# EAGLE board SPH0645 (EAGLE 9.6.2)
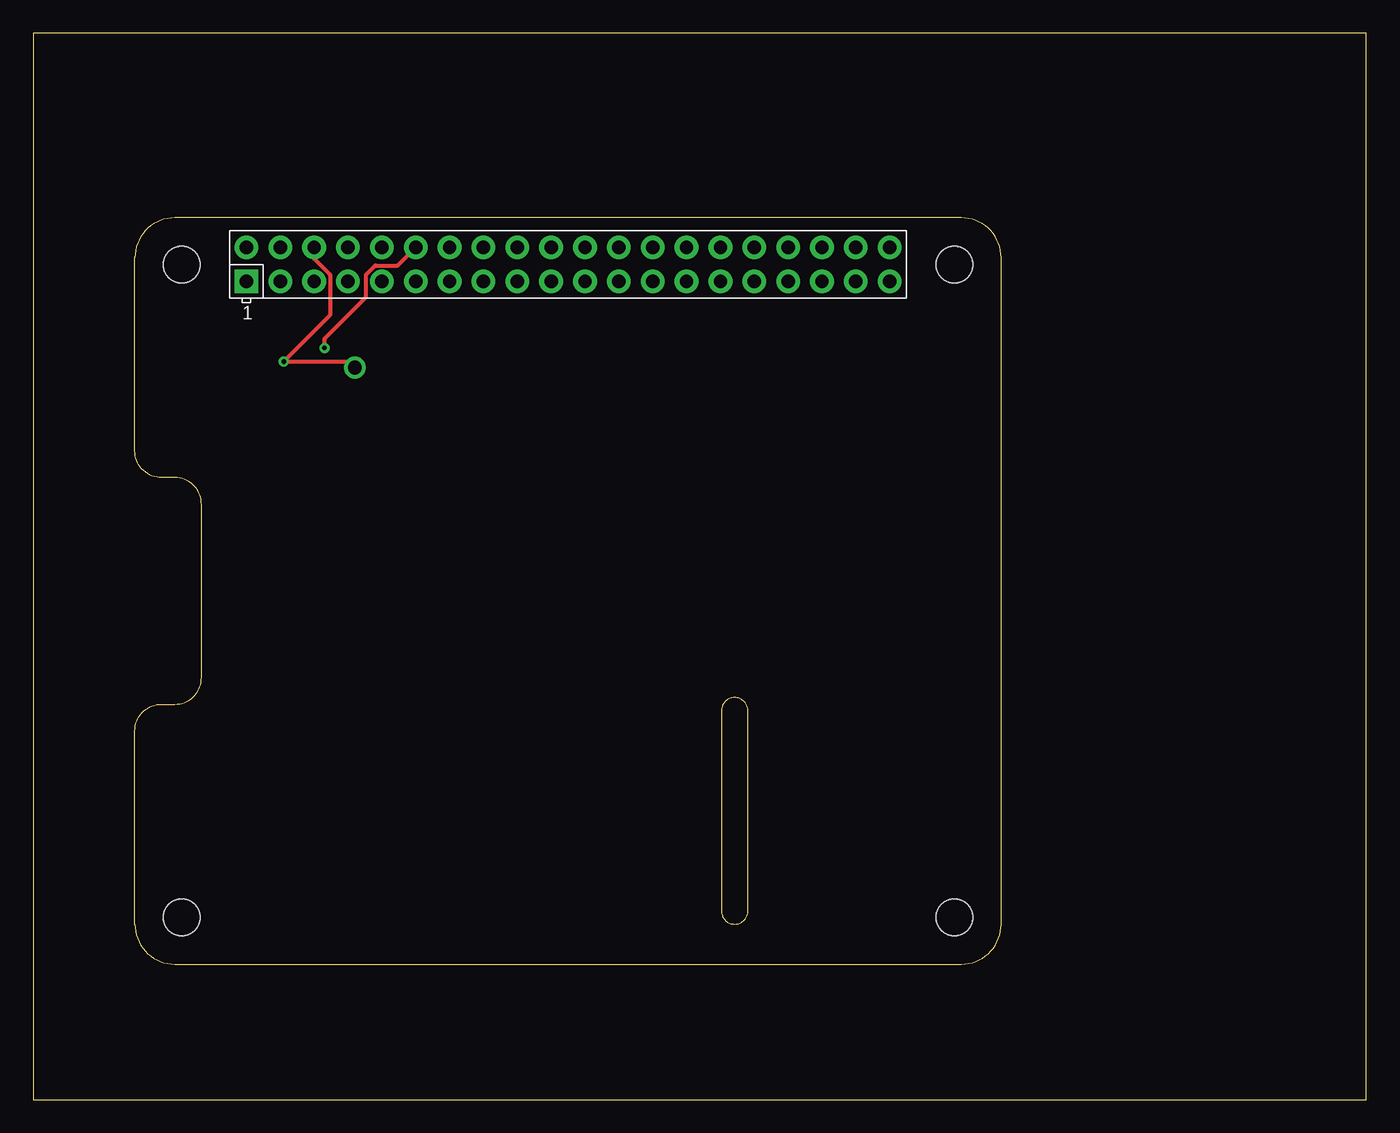
[diagram p0: board, top side]
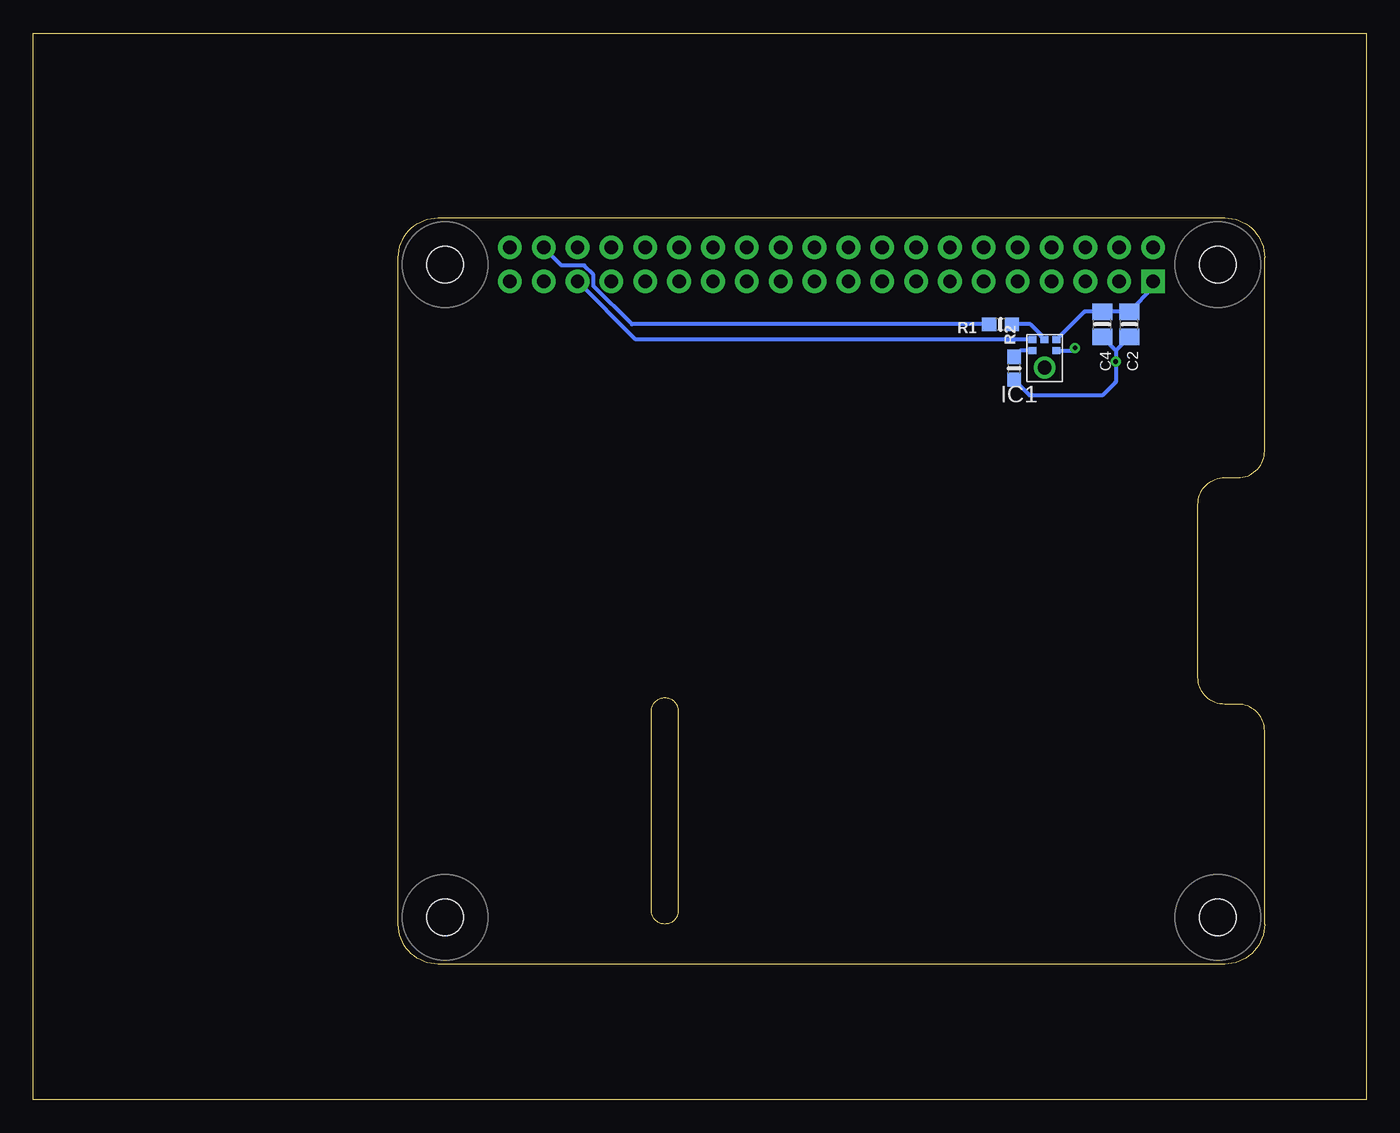
[diagram p1: board, bottom side, seen from below]

Size 100 x 80 mm. Coordinates in mm from the lower left corner, seen from the top.
Outline: 0,0 100,0 100,80 0,80 0,0
Copper layers (1*16): Top 0.035mm / dielectric 1.5mm / Bottom 0.035mm
Design rules "default": minimum track width 6mil, minimum drill 0.35mm, track to track 6mil, track to pad 6mil, pad to pad 6mil, via to via 6mil, smd to smd 6mil, copper to edge 40mil, drill to drill 6mil, minimum pad ring 10mil, minimum via ring 8mil, stop-mask expansion 4mil, vias tented up to drill 0mil, thermal gap 10mil

## Footprints (pad centres in the part's own frame; a part is rotated, then mirrored left to right if it is on the bottom)
0805-NO = smd 1.24 x 1.5: 1 -0.95,0; 2 0.95,0
SPH0645LM4H = smd 0.6 x 0.525: 1 -0.9,1.4; 2 -0.9,0.55; 4 0.9,0.55; 5 0.9,1.4; 6 0,1.4 | drill 1.025 pad 1.625: 3 0,-0.71
0603-NO = smd 1.075 x 1: 1 -0.85,0; 2 0.85,0
RASPI_BOARD_B+HAT_DF_CF = drill 1 pad 1.778 square: 1 8.37,51.23 | drill 1 pad 1.778: 2 8.37,53.77; 3 10.91,51.23; 4 10.91,53.77; 5 13.45,51.23; 6 13.45,53.77; 7 15.99,51.23; 8 15.99,53.77; 9 18.53,51.23; 10 18.53,53.77; 11 21.07,51.23; 12 21.07,53.77; 13 23.61,51.23; 14 23.61,53.77; 15 26.15,51.23; 16 26.15,53.77; 17 28.69,51.23; 18 28.69,53.77; 19 31.23,51.23; 20 31.23,53.77; 21 33.77,51.23; 22 33.77,53.77; 23 36.31,51.23; 24 36.31,53.77; 25 38.85,51.23; 26 38.85,53.77; 27 41.39,51.23; 28 41.39,53.77; 29 43.93,51.23; 30 43.93,53.77; 31 46.47,51.23; 32 46.47,53.77; 33 49.01,51.23; 34 49.01,53.77; 35 51.55,51.23; 36 51.55,53.77; 37 54.09,51.23; 38 54.09,53.77; 39 56.63,51.23; 40 56.63,53.77 | hole 2.75: 3.5,3.5; 3.5,52.5; 61.5,3.5; 61.5,52.5

## Placement (x,y rotation side)
C2  220pF  [0805-NO]  17.78,58.17 270 bottom
C4  1uF  [0805-NO]  19.81,58.17 270 bottom
IC1  MIC_I2S_SPH0645  [SPH0645LM4H]  24.13,55.63 0 bottom
R1  68  [0603-NO]  27.43,58.17 180 bottom
R2  10k  [0603-NO]  26.42,54.86 90 bottom
X1  RASPI_BOARD_B+_HDC  [RASPI_BOARD_B+HAT_DF_CF]  7.62,10.16 0 top

## Library data of the parts
C2 C4 IC1 R1 R2 = microbuilder
X1 = raspberrypi_bastelstube_v13

## Nets
5V0: X1.2
BCLK: IC1.4 X1.12
GND: C2.2 C4.2 IC1.3 R2.1 X1.6
N$1: IC1.6 R1.1
N$2: R1.2 X1.38
SELECT: IC1.2 R2.2
VDD: C2.1 C4.1 IC1.5 X1.1
WS: IC1.1 X1.35

## Tracks (layer width: path | path; a pad name or v marks a point on that pad's centre or on a via)
BCLK  (via drill 0.35)
  Top 0.305: v21.84,56.39 21.84,57.08 24.96,60.2 24.96,61.88 25.66,62.58 27.34,62.58 X1.12
  Bottom 0.305: IC1.4 22.06,56.18 v21.84,56.39
GND  (via drill 0.35)
  Top 0.305: X1.6 21.07,63.08 22.26,61.88 22.26,58.84 v18.8,55.37 23.67,55.37 IC1.3
  Bottom 0.305: C2.2 18.8,56.2 | 18.8,56.2 v18.8,55.37 18.8,53.85 19.81,52.83 25.23,52.83 R2.1 | C4.2 18.8,56.2
N$1
  Bottom 0.305: IC1.6 24.43,57.32 24.43,57.41 25.18,58.17 R1.1
N$2
  Bottom 0.305: X1.38 60.36,62.58 58.68,62.58 57.98,61.88 57.98,61.05 55.09,58.17 R1.2
SELECT
  Bottom 0.305: IC1.2 25.95,56.18 R2.2
VDD
  Bottom 0.305: X1.1 15.99,60.91 C2.1 C4.1 21.14,59.12 IC1.5
WS
  Bottom 0.305: IC1.1 54.81,57.03 X1.35